# EAGLE board eBook_Reader_Board (EAGLE 9.7.0)
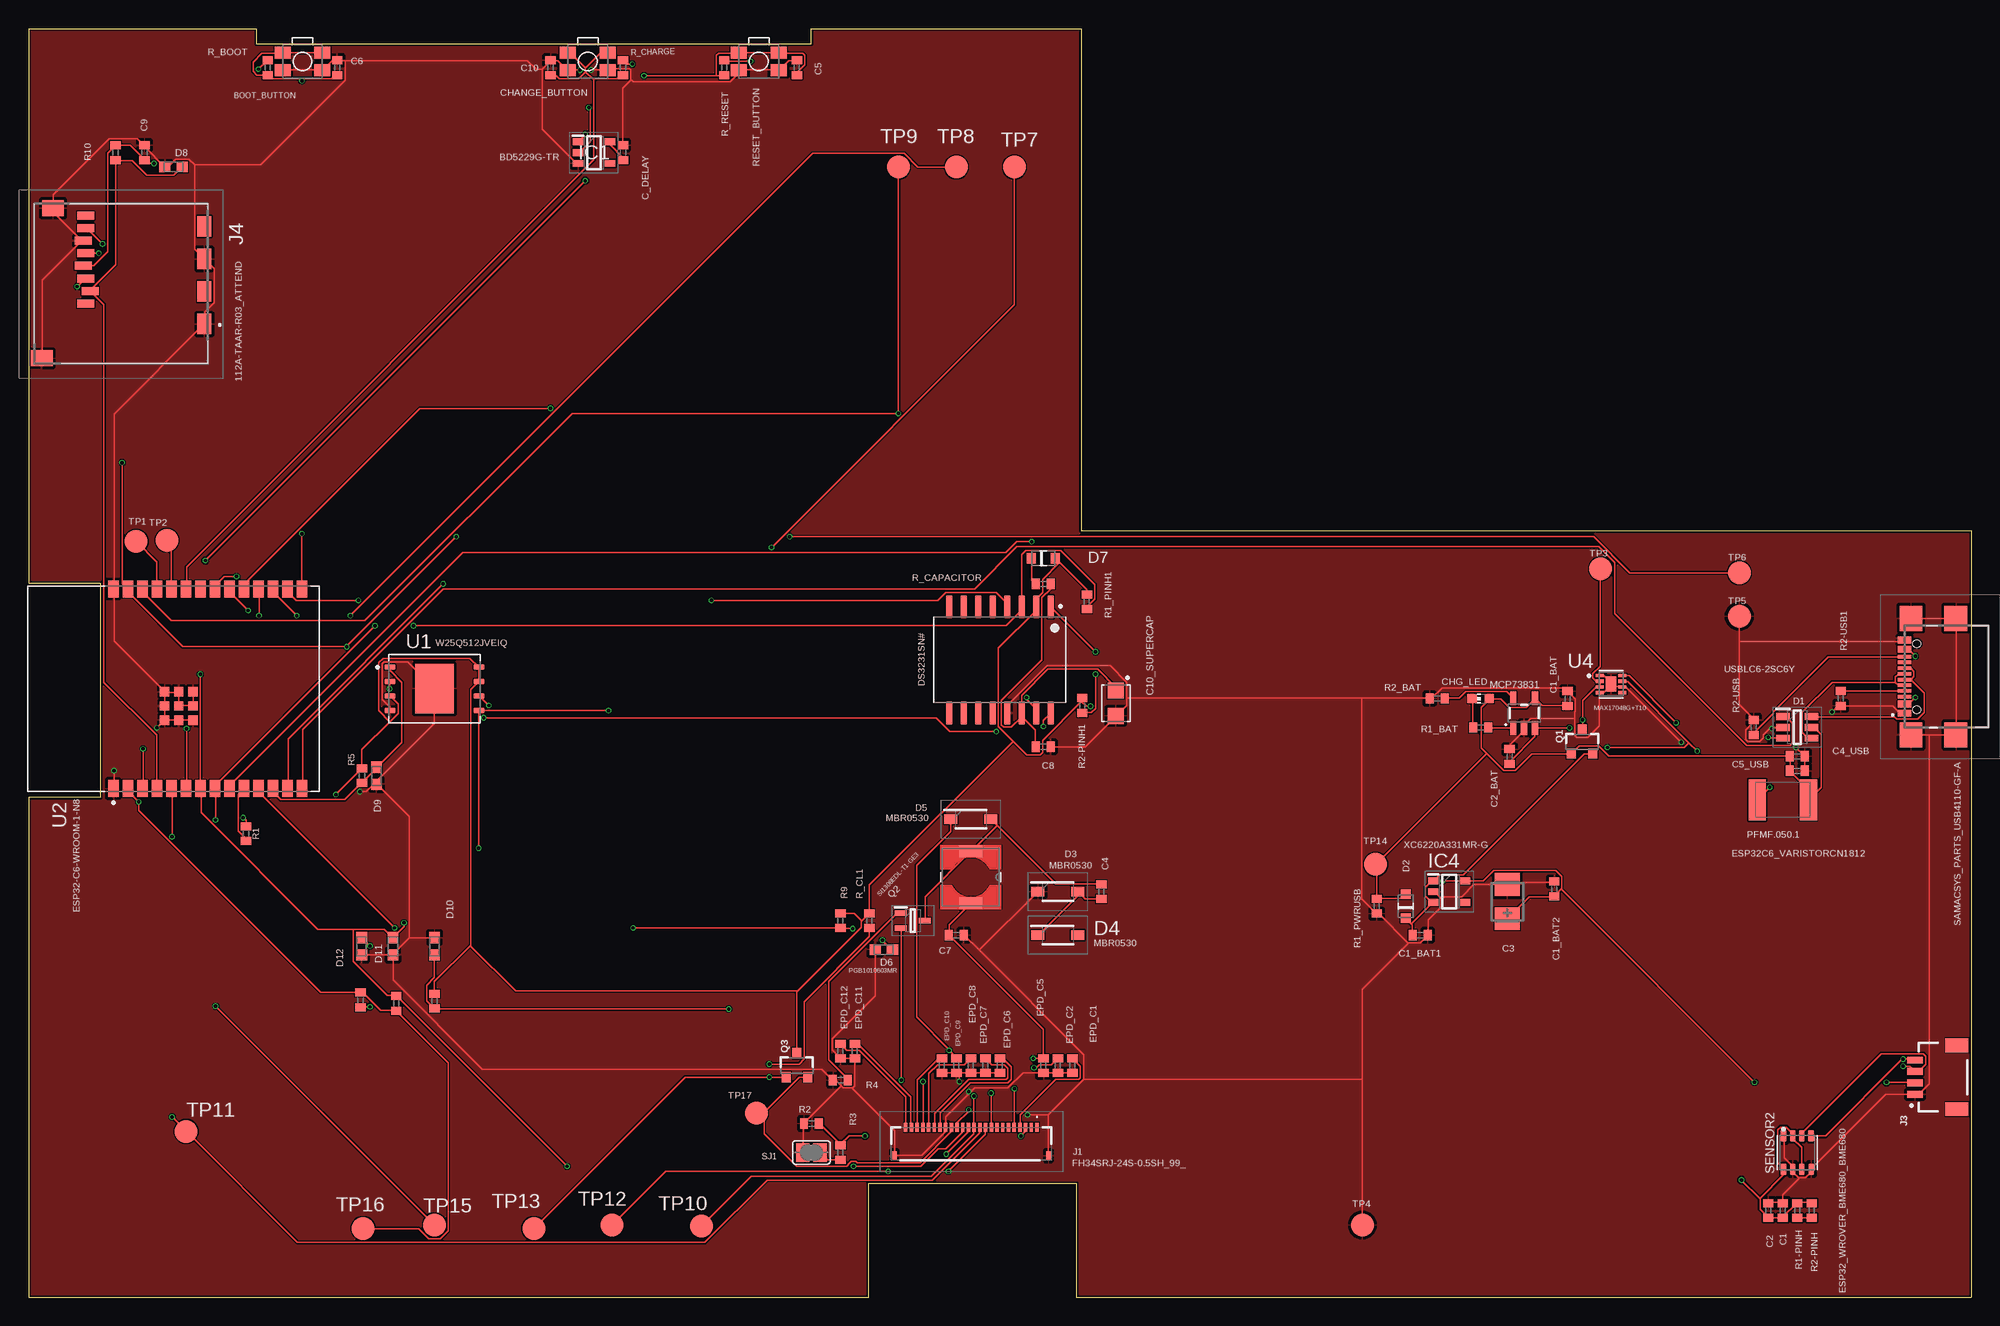
[diagram p0: board, top side]
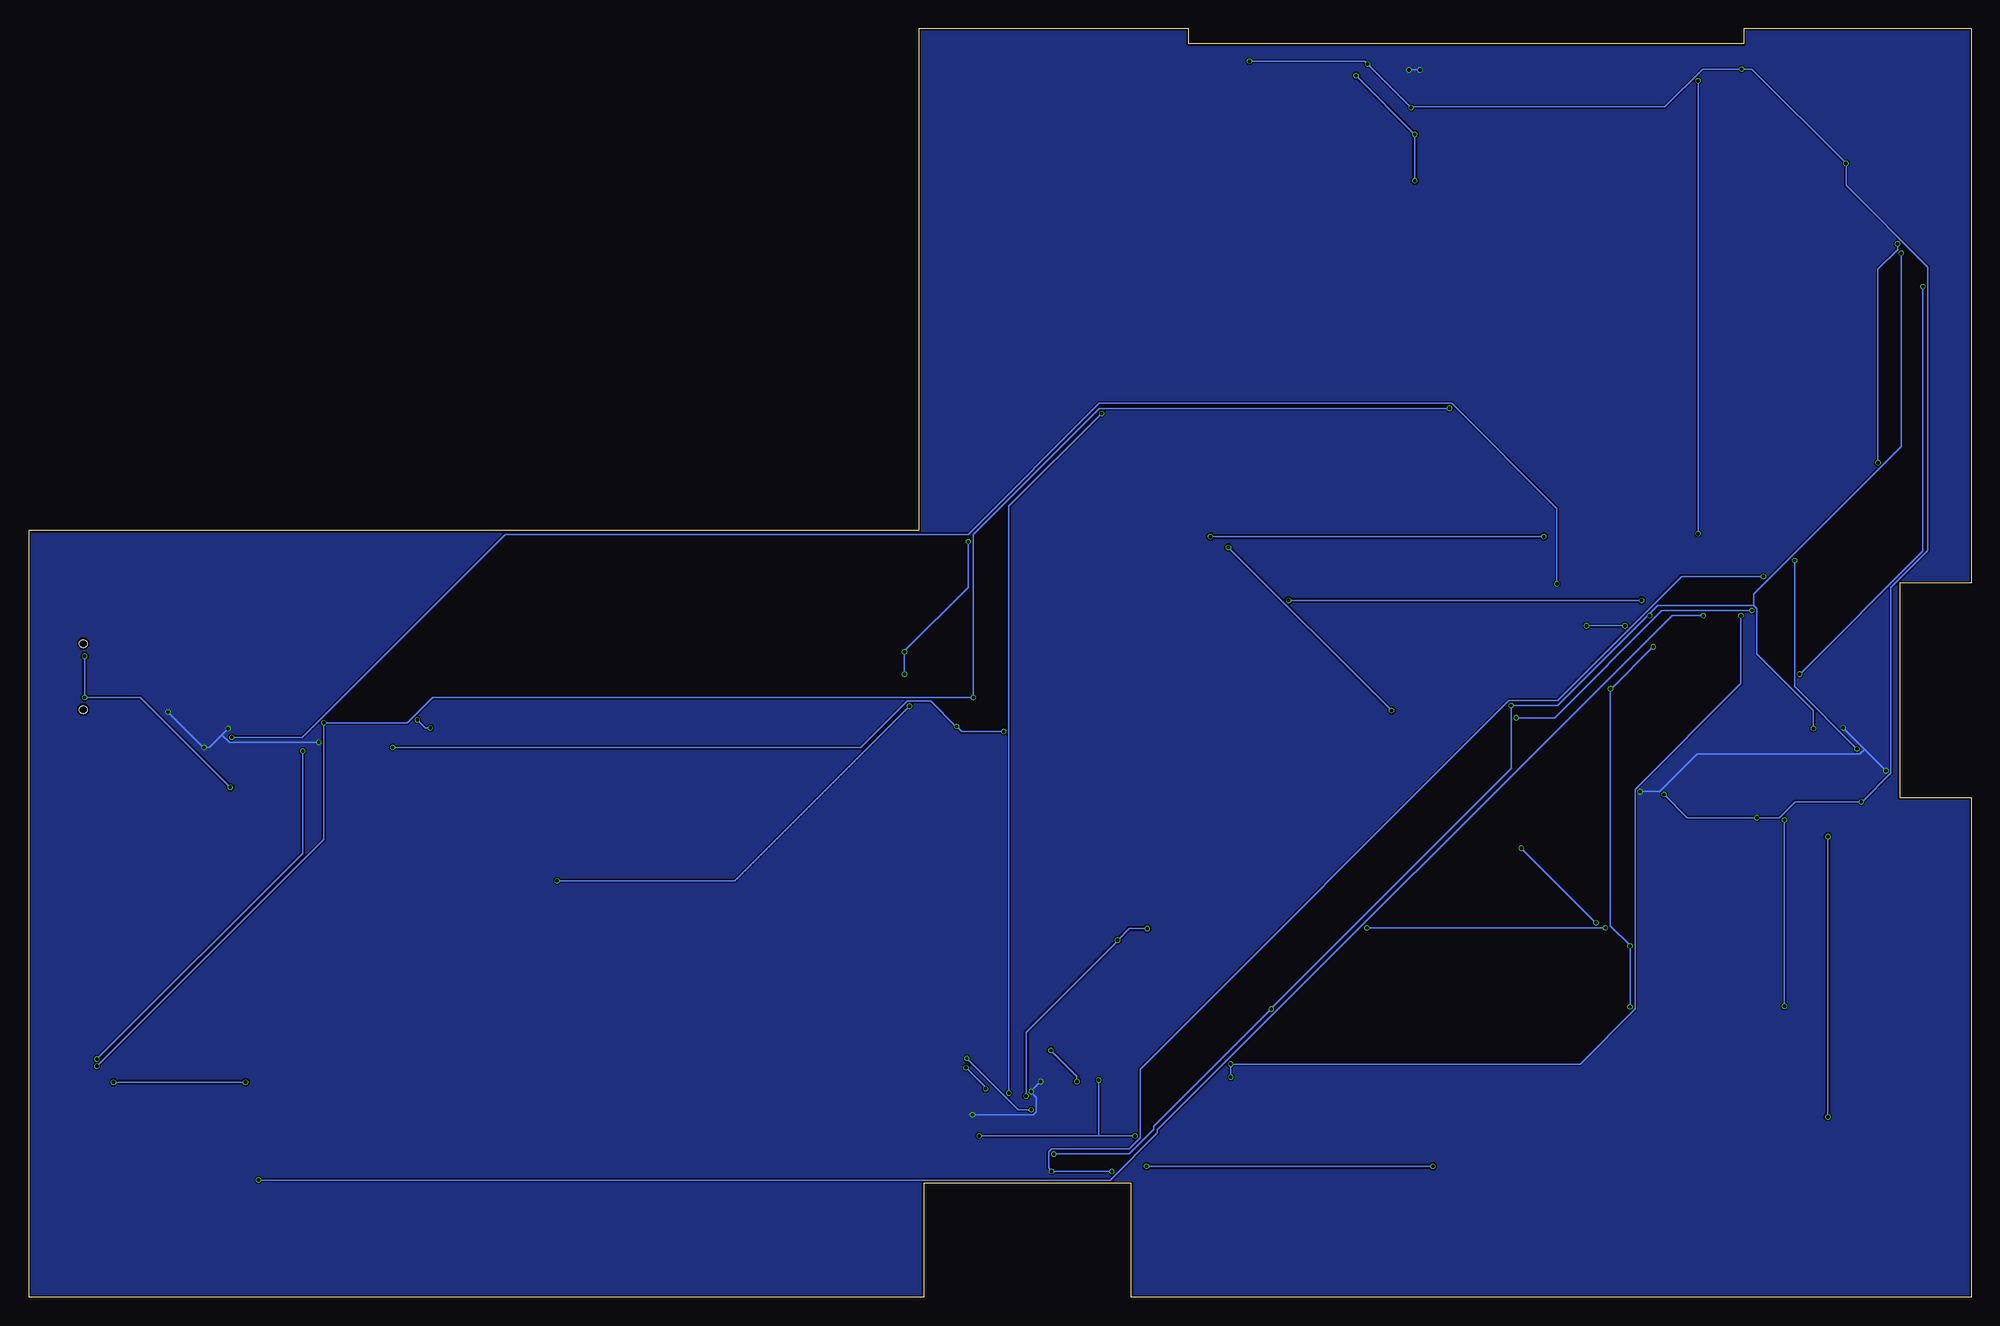
[diagram p1: board, bottom side, seen from below]

Size 170.2 x 111.2 mm. Coordinates in mm from the lower left corner, seen from the top.
Outline: 0,111.2 0,62.6 6.3,62.6 6.3,43.8 0,43.8 0,0 73.6,0 73.6,10 91.8,10 91.8,0 170.2,0 170.2,67.2 92.2,67.2 92.2,111.2 68.58,111.2 68.58,109.86 19.96,109.86 19.96,111.2 0,111.2
Copper layers (1*16): Top / Bottom
Stack-up Default Layer Stack: Top User Defined 0.035mm / Dielectric-1 User Defined 1mm / Bottom User Defined 0.035mm
Design rules: minimum drill size 0.3mm, minimum copper width classes=1 0.3mm, minimum copper width classes=2 0.15mm, minimum copper width 5mil, keepout clearance 0mil, drill distance 6mil, via restrict clearance 0mil, dimension clearance 0.2mm, restrict clearance 0mil, copper clearance wire_polygon to wire_polygon 5mil, copper clearance wire_polygon to pad_smd 5mil, copper clearance wire_polygon to via 5mil, copper clearance pad_smd to pad_smd 5mil, copper clearance pad_smd to via 5mil, copper clearance via to via 5mil, copper clearance smd to pad (same net) 5mil, copper clearance smd to via (same net) 5mil, copper clearance smd to smd (same net) 5mil
Net classes: 1 power nets: width 0.3 mm; 2 normal nets: width 0.15 mm

## Footprints (pad centres in the part's own frame; a part is rotated, then mirrored left to right if it is on the bottom)
MYBUTTON = smd 1.4 x 1.05: 1 1.75,0.75; 2 -1.75,0.75; 3 -1.75,-0.75; 4 1.75,-0.75
EAGLE-LTSPICE_C0402 = smd 0.7 x 0.9: 1 -0.65,0; 2 0.65,0
RCL_CT3528 = smd 2 x 2.2: + -1.5,0; - 1.5,0
CAPCP3225X100N = smd 1.4 x 1.4: 1 -1.1,0; 2 1.1,0
ADAFRUIT_CHIP-LED0603 = smd 0.8 x 0.8: A 0,-0.75; C 0,0.75
SOT95P280X145-6N = smd 1.2 x 0.6: 1 -1.25,0.95; 2 -1.25,0; 3 -1.25,-0.95; 4 1.25,-0.95; 5 1.25,0; 6 1.25,0.95
ESP32_WROVER_AVX---SD0805S020S1R0_AVX_SD0805S020S1R0_0 = smd 0.8 x 0.9: 1 -1.05,0; 2 1.05,0
SOD3716X135N = smd 1.15 x 0.8: 1 -1.75,0; 2 1.75,0
DIOC1608X36N = smd 0.97 x 0.94: 1 -0.75,0; 2 0.75,0
ESP32_WROVER_EAGLE-LTSPICE_C0402 = smd 0.7 x 0.9: 1 -0.65,0; 2 0.65,0
SOT95P280X125-5N = smd 0.9 x 0.6: 1 -1.4,0.95; 2 -1.4,0; 3 -1.4,-0.95; 4 1.4,-0.95; 5 1.4,0.95
SOT95P280X120-5N = smd 0.9 x 0.6: 1 -1.4,0.95; 2 -1.4,0; 3 -1.4,-0.95; 4 1.4,-0.95; 5 1.4,0.95
FH34SRJ24S05SH99 = smd 0.3 x 0.8: 1 5.75,1.45; 2 5.25,1.45; 3 4.75,1.45; 4 4.25,1.45; 5 3.75,1.45; 6 3.25,1.45; 7 2.75,1.45; 8 2.25,1.45; 9 1.75,1.45; 10 1.25,1.45; 11 0.75,1.45; 12 0.25,1.45; 13 -0.25,1.45; 14 -0.75,1.45; 15 -1.25,1.45; 16 -1.75,1.45; 17 -2.25,1.45; 18 -2.75,1.45; 19 -3.25,1.45; 20 -3.75,1.45; 21 -4.25,1.45; 22 -4.75,1.45; 23 -5.25,1.45; 24 -5.75,1.45 | smd 0.4 x 0.8: MP1 6.75,-1.05; MP2 -6.75,-1.05
SAMACSYS_PARTS_USB4110GFA = smd 0.3 x 1.15: A1 -3.35,3.678; A4 -2.55,3.678; A5 -1.25,3.678; A6 -0.25,3.678; A7 0.25,3.678; A8 1.25,3.678; A9 2.55,3.678; A12 3.35,3.678; B1 3.05,3.678; B4 2.25,3.678; B5 1.75,3.678; B6 0.75,3.678; B7 -0.75,3.678; B8 -1.75,3.678; B9 -2.25,3.678; B12 -3.05,3.678 | smd 2.18 x 2: MP1 -5.11,-0.827; MP2 5.11,-0.827; MP3 -5.11,3.103; MP4 5.11,3.103 | hole 0.65: -2.89,2.603; 2.89,2.603
JST04_1MM_RA = smd 0.6 x 1.35: 1 -1.5,0; 2 -0.5,0; 3 0.5,0; 4 1.5,0 | smd 1.2 x 2: NC1 2.8,-3.675; NC2 -2.8,-3.675
112ATAARR03ATTEND = smd 1.8 x 1.2: G1 10.6,10.4; G2 4.9,10.4; S1 7.75,10.4; S2 2.05,10.4 | smd 1.4 x 1.9: G3 13.6,-3.85; G4 0.45,-2.85 | smd 0.7 x 1.5: P1 8.8,0; P2 7.7,0.4; P3 6.6,0; P4 5.5,-0.2; P5 4.4,0; P6 3.3,-0.2; P7 2.2,0; P8 1.1,0
IND_4828-WE-TPC_WRE = smd 1.016 x 2.032: 1 -2.286,0; 2 2.286,0
ESP32_WROVER_SPARKFUN-IC-POWER_SOT23-5 = smd 0.55 x 1.2: 1 -0.95,-1.3; 2 0,-1.3; 3 0.95,-1.3; 4 0.95,1.3; 5 -0.95,1.3
ESP32C6_VARISTOR_CT/CN1812 = smd 1.5 x 3.6: 1 -2.25,0; 2 2.25,0
ESP32_WROVER_SPARKFUN-DISCRETESEMI_SOT23-3 = smd 0.8 x 0.9: 1 -0.95,-1; 2 0.95,-1; 3 0,1.1
SOT65P210X110-3N = smd 1.05 x 0.5: 1 -1.05,0.65; 2 -1.05,-0.65; 3 1.05,0
ESP32_WROVER_EAGLE-LTSPICE_R0402 = smd 0.7 x 0.9: 1 -0.65,0; 2 0.65,0
ESP32_WROVER_BME680_PSON80P300X300X100-8N = smd 1.016 x 0.5: 1 1.458,1.2; 2 1.458,0.4; 3 1.458,-0.4; 4 1.458,-1.2; 5 -1.458,-1.22; 6 -1.458,-0.4; 7 -1.458,0.4; 8 -1.458,1.2
SJ = smd 1.168 x 1.6: 1 -0.762,0; 2 0.762,0
TP20R = smd 2 x 2: TP 0,0
SON127P600X800X80-9N = smd 0.94 x 0.44: 1 -3.895,1.905; 2 -3.895,0.635; 3 -3.895,-0.635; 4 -3.895,-1.905; 5 3.895,-1.905; 6 3.895,-0.635; 7 3.895,0.635; 8 3.895,1.905 | smd 3.4 x 4.3: 9 0,0
XCVR_ESP32-C6-WROOM-1-N8 = smd 1.5 x 0.9: 1 -8.75,5.26; 2 -8.75,3.99; 3 -8.75,2.72; 4 -8.75,1.45; 5 -8.75,0.18; 6 -8.75,-1.09; 7 -8.75,-2.36; 8 -8.75,-3.63; 9 -8.75,-4.9; 10 -8.75,-6.17; 11 -8.75,-7.44; 12 -8.75,-8.71; 13 -8.75,-9.98; 14 -8.75,-11.25; 15 8.75,-11.25; 16 8.75,-9.98; 17 8.75,-8.71; 18 8.75,-7.44; 19 8.75,-6.17; 20 8.75,-4.9; 21 8.75,-3.63; 22 8.75,-2.36; 23 8.75,-1.09; 24 8.75,0.18; 25 8.75,1.45; 26 8.75,2.72; 27 8.75,3.99; 28 8.75,5.26 | smd 0.8 x 0.8: 29_1 -2.755,0.79; 29_2 -1.505,0.79; 29_3 -0.255,0.79; 29_4 -2.755,-0.46; 29_5 -1.505,-0.46; 29_6 -0.255,-0.46; 29_7 -2.755,-1.71; 29_8 -1.505,-1.71; 29_9 -0.255,-1.71
SOIC127P1032X265-16N = smd 2.05 x 0.59: 1 -4.655,4.445; 2 -4.655,3.175; 3 -4.655,1.905; 4 -4.655,0.635; 5 -4.655,-0.635; 6 -4.655,-1.905; 7 -4.655,-3.175; 8 -4.655,-4.445; 9 4.655,-4.445; 10 4.655,-3.175; 11 4.655,-1.905; 12 4.655,-0.635; 13 4.655,0.635; 14 4.655,1.905; 15 4.655,3.175; 16 4.655,4.445
SON50P200X200X80-9N = smd 0.76 x 0.27: 1 -0.985,0.75; 2 -0.985,0.25; 3 -0.985,-0.25; 4 -0.985,-0.75; 5 0.985,-0.75; 6 0.985,-0.25; 7 0.985,0.25; 8 0.985,0.75 | smd 0.9 x 1.3: 9 0,0

## Placement (x,y rotation side)
BOOT_BUTTON  BUTTON_CUSYOMV1  [MYBUTTON]  24,108.31 180 top
C1  100nF  [EAGLE-LTSPICE_C0402]  153.67,7.62 90 top
C1_BAT  4.7uF  [EAGLE-LTSPICE_C0402]  134.82,52.48 90 top
C1_BAT1  4.7uF  [EAGLE-LTSPICE_C0402]  121.92,31.75 0 top
C1_BAT2  4.7uF  [EAGLE-LTSPICE_C0402]  133.65,35.79 90 top
C2  100nF  [EAGLE-LTSPICE_C0402]  152.4,7.62 90 top
C2_BAT  4.7uF  [EAGLE-LTSPICE_C0402]  129.74,47.4 90 top
C3  100uF TANT  [RCL_CT3528]  129.54,34.69 90 top
C4  4.7uF/25V  [EAGLE-LTSPICE_C0402]  93.98,35.56 90 top
C4_USB  100nF  [EAGLE-LTSPICE_C0402]  154.94,47.42 0 top
C5  1uF  [EAGLE-LTSPICE_C0402]  67.31,107.77 90 top
C5_USB  4.7uF  [EAGLE-LTSPICE_C0402]  154.94,46.15 0 top
C6  100nF  [EAGLE-LTSPICE_C0402]  27.05,107.77 90 top
C7  100nF  [EAGLE-LTSPICE_C0402]  81.28,31.75 0 top
C8  100nF  [EAGLE-LTSPICE_C0402]  88.9,48.26 0 top
C9  100nF  [EAGLE-LTSPICE_C0402]  10.16,100.33 90 top
C10  100nF  [EAGLE-LTSPICE_C0402]  45.72,107.77 90 top
C10_SUPERCAP  CPH3225A  [CAPCP3225X100N]  95.25,52.07 270 top
C_DELAY  100nF  [EAGLE-LTSPICE_C0402]  52.07,100.33 90 top
CHANGE_BUTTON  BUTTON_CUSYOMV1  [MYBUTTON]  49,108.31 180 top
CHG_LED  [ADAFRUIT_CHIP-LED0603]  127.2,52.48 90 top
D1  USBLC6-2SC6Y  [SOT95P280X145-6N]  154.94,49.96 0 top
D2  ESP32_WROVER_AVX---SD0805S020S1R0_AVX_SD0805S020S1R0_0_0AVX_SD0805S020S1R0_0_0  [ESP32_WROVER_AVX---SD0805S020S1R0_AVX_SD0805S020S1R0_0]  120.65,34.29 90 top
D3  MBR0530  [SOD3716X135N]  90.17,35.56 0 top
D4  MBR0530  [SOD3716X135N]  90.17,31.75 0 top
D5  MBR0530  [SOD3716X135N]  82.55,41.91 0 top
D6  PGB1010603MR  [DIOC1608X36N]  74.93,30.48 0 top
D7  ESP32_WROVER_AVX---SD0805S020S1R0_AVX_SD0805S020S1R0_0_0AVX_SD0805S020S1R0_0_0  [ESP32_WROVER_AVX---SD0805S020S1R0_AVX_SD0805S020S1R0_0]  88.9,64.77 0 top
D8  PGB1010603MR  [DIOC1608X36N]  12.7,99.06 0 top
D9  PGB1010603MR  [DIOC1608X36N]  30.48,45.72 90 top
D10  PGB1010603MR  [DIOC1608X36N]  35.56,30.78 270 top
D11  PGB1010603MR  [DIOC1608X36N]  31.92,30.78 90 top
D12  PGB1010603MR  [DIOC1608X36N]  29.18,30.78 90 top
EPD_C1  1uF/50V  [ESP32_WROVER_EAGLE-LTSPICE_C0402]  91.44,20.32 90 top
EPD_C2  1uF/50V  [ESP32_WROVER_EAGLE-LTSPICE_C0402]  90.17,20.32 90 top
EPD_C5  1uF/50V  [ESP32_WROVER_EAGLE-LTSPICE_C0402]  88.9,20.32 90 top
EPD_C6  1uF/50V  [ESP32_WROVER_EAGLE-LTSPICE_C0402]  85.09,20.32 90 top
EPD_C7  1uF/50V  [ESP32_WROVER_EAGLE-LTSPICE_C0402]  83.82,20.32 90 top
EPD_C8  1uF/50V  [ESP32_WROVER_EAGLE-LTSPICE_C0402]  82.55,20.32 90 top
EPD_C9  1uF/50V  [ESP32_WROVER_EAGLE-LTSPICE_C0402]  81.28,20.32 90 top
EPD_C10  1uF/50V  [ESP32_WROVER_EAGLE-LTSPICE_C0402]  80.01,20.32 90 top
EPD_C11  1uF/50V  [ESP32_WROVER_EAGLE-LTSPICE_C0402]  72.39,21.59 90 top
EPD_C12  1uF/50V  [ESP32_WROVER_EAGLE-LTSPICE_C0402]  71.12,21.59 90 top
IC1  BD5229G-TR  [SOT95P280X125-5N]  49.53,100.33 0 top
IC4  XC6220A331MR-G  [SOT95P280X120-5N]  124.46,35.56 0 top
J1  FH34SRJ-24S-0.5SH_99_  [FH34SRJ24S05SH99]  82.59,13.47 0 top
J2  SAMACSYS_PARTS_USB4110-GF-A  [SAMACSYS_PARTS_USB4110GFA]  168.01,54.4 90 top
J3  QWIIC_RIGHT_ANGLE  [JST04_1MM_RA]  165.25,19.3 90 top
J4  112A-TAAR-R03_ATTEND  [112ATAARR03ATTEND]  5,95.9 270 top
L1  68uH  [IND_4828-WE-TPC_WRE]  82.55,36.83 270 top
MCP73831  ESP32_WROVER_SPARKFUN-IC-POWER_MCP73831  [ESP32_WROVER_SPARKFUN-IC-POWER_SOT23-5]  131.01,51.21 0 top
PFMF.050.1  ESP32C6_VARISTORCN1812  [ESP32C6_VARISTOR_CT/CN1812]  153.67,43.61 0 top
Q1  20V/4.2A/52mΩ/1.4W  [ESP32_WROVER_SPARKFUN-DISCRETESEMI_SOT23-3]  136.09,48.67 0 top
Q2  SI1308EDL-T1-GE3  [SOT65P210X110-3N]  77.47,33.02 0 top
Q3  20V/4.2A/52mΩ/1.4W  [ESP32_WROVER_SPARKFUN-DISCRETESEMI_SOT23-3]  67.31,20.32 0 top
R1  10k  [ESP32_WROVER_EAGLE-LTSPICE_R0402]  19.05,40.64 90 top
R1-PINH  10k  [ESP32_WROVER_EAGLE-LTSPICE_R0402]  154.94,7.62 90 top
R1_BAT  200  [ESP32_WROVER_EAGLE-LTSPICE_R0402]  127.2,49.94 0 top
R1_PINH1  10K  [ESP32_WROVER_EAGLE-LTSPICE_R0402]  92.71,60.96 90 top
R1_PWRUSB  100k  [ESP32_WROVER_EAGLE-LTSPICE_R0402]  118.11,34.29 90 top
R2  2.2  [ESP32_WROVER_EAGLE-LTSPICE_R0402]  68.58,15.24 0 top
R2-PINH  10k  [ESP32_WROVER_EAGLE-LTSPICE_R0402]  156.21,7.62 90 top
R2-PINH1  10K  [ESP32_WROVER_EAGLE-LTSPICE_R0402]  92.31,51.87 90 top
R2-USB  5k1  [ESP32_WROVER_EAGLE-LTSPICE_R0402]  151.13,49.96 90 top
R2-USB1  5k1  [ESP32_WROVER_EAGLE-LTSPICE_R0402]  158.75,52.5 90 top
R2_BAT  2K  [ESP32_WROVER_EAGLE-LTSPICE_R0402]  123.39,52.48 0 top
R3  0.47  [ESP32_WROVER_EAGLE-LTSPICE_R0402]  71.12,12.7 90 top
R4  10k  [ESP32_WROVER_EAGLE-LTSPICE_R0402]  71.12,19.05 0 top
R5  10k  [ESP32_WROVER_EAGLE-LTSPICE_R0402]  29.21,45.72 90 top
R6  10k  [ESP32_WROVER_EAGLE-LTSPICE_R0402]  35.56,25.97 90 top
R7  10k  [ESP32_WROVER_EAGLE-LTSPICE_R0402]  32.22,25.77 270 top
R8  10k  [ESP32_WROVER_EAGLE-LTSPICE_R0402]  29.08,26.07 90 top
R9  10k  [ESP32_WROVER_EAGLE-LTSPICE_R0402]  71.12,33.02 90 top
R10  10k  [ESP32_WROVER_EAGLE-LTSPICE_R0402]  7.62,100.33 90 top
R_BOOT  10K  [ESP32_WROVER_EAGLE-LTSPICE_R0402]  20.95,107.77 90 top
R_CAPACITOR  15  [ESP32_WROVER_EAGLE-LTSPICE_R0402]  88.9,62.53 0 top
R_CHARGE  10K  [ESP32_WROVER_EAGLE-LTSPICE_R0402]  52.07,107.77 90 top
R_CL1  10K  [ESP32_WROVER_EAGLE-LTSPICE_R0402]  73.66,33.02 90 top
R_RESET  10K  [ESP32_WROVER_EAGLE-LTSPICE_R0402]  60.95,107.77 90 top
RESET_BUTTON  BUTTON_CUSYOMV1  [MYBUTTON]  63.97,108.31 180 top
SENSOR2  ESP32_WROVER_BME680_BME680  [ESP32_WROVER_BME680_PSON80P300X300X100-8N]  154.94,12.7 90 top
SJ1  [SJ]  68.58,12.7 0 top
TP1  TPTP20R  [TP20R]  9.43,66.25 0 top
TP2  TPTP20R  [TP20R]  12.13,66.35 0 top
TP3  TPTP20R  [TP20R]  137.72,63.85 0 top
TP4  TPTP20R  [TP20R]  116.84,6.35 0 top
TP5  TPTP20R  [TP20R]  149.86,59.69 0 top
TP6  TPTP20R  [TP20R]  149.86,63.5 0 top
TP7  TPTP20R  [TP20R]  86.36,99.06 0 top
TP8  TPTP20R  [TP20R]  81.28,99.06 0 top
TP9  TPTP20R  [TP20R]  76.2,99.06 0 top
TP10  TPTP20R  [TP20R]  58.96,6.25 0 top
TP11  TPTP20R  [TP20R]  13.81,14.55 0 top
TP12  TPTP20R  [TP20R]  51.11,6.35 0 top
TP13  TPTP20R  [TP20R]  44.26,6.05 0 top
TP14  TPTP20R  [TP20R]  118.01,37.95 0 top
TP15  TPTP20R  [TP20R]  35.56,6.35 0 top
TP16  TPTP20R  [TP20R]  29.31,6.05 0 top
TP17  TPTP20R  [TP20R]  63.76,16.15 0 top
U1  W25Q512JVEIQ  [SON127P600X800X80-9N]  35.56,53.34 0 top
U2  ESP32-C6-WROOM-1-N8  [XCVR_ESP32-C6-WROOM-1-N8]  12.7,53.34 90 top
U3  DS3231SN#  [SOIC127P1032X265-16N]  85.09,55.88 270 top
U4  MAX17048G+T10  [SON50P200X200X80-9N]  138.63,53.75 0 top

## Library data of the parts
BOOT_BUTTON CHANGE_BUTTON CHG_LED PFMF.050.1 RESET_BUTTON SJ1 TP1-TP17 = DeskAssistant v19 v1
C1 C1_BAT C1_BAT1 C1_BAT2 C2 C2_BAT C4 C4_USB C5 C5_USB C6-C10 C_DELAY EPD_C1 EPD_C2 EPD_C5-EPD_C12 = DeskAssistant v19 v1; SPICEMODEL: NONE; SPICEPREFIX: C
C3 = DeskAssistant v19 v1; SPICEPREFIX: C
C10_SUPERCAP = DeskAssistant v19 v1; AVAILABILITY: Not in stock; CHECK_PRICES: https://www.snapeda.com/parts/CPH3225A/Seiko+Instruments/view-part/?ref=eda; DESCRIPTION: 11 mF (EDLC) Supercapacitor 3.3 V 1210 (3225 Metric) - -; MF: Seiko Instruments; MP: CPH3225A; PACKAGE: 1210 Seiko; PRICE: None; PURCHASE-URL: https://www.snapeda.com/api/url_track_click_mouser/?unipart_id=562593&manufacturer=Seiko Instruments&part_name=CPH3225A&search_term=None; SNAPEDA_LINK: https://www.snapeda.com/parts/CPH3225A/Seiko+Instruments/view-part/?ref=snap
D1 = DeskAssistant v19 v1; AVAILABILITY: In Stock; CHECK_PRICES: https://www.snapeda.com/parts/USBLC6-2SC6Y/STMicroelectronics/view-part/?ref=eda; DESCRIPTION: 17V Clamp 5A (8/20µs) Ipp Tvs Diode Surface Mount SOT-23-6; MF: STMicroelectronics; MP: USBLC6-2SC6Y; PACKAGE: SOT-23-6 STMicroelectronics; PRICE: None; SNAPEDA_LINK: https://www.snapeda.com/parts/USBLC6-2SC6Y/STMicroelectronics/view-part/?ref=snap
D2 D7 = DeskAssistant v19 v1; CENTROID_NOT_SPECIFIED: No; DATASHEET: http://datasheets.avx.com/schottky.pdf; DIGIKEY_DESCRIPTION: DIODE SCHOTTKY 20V 1A 0805; DIGIKEY_PART_NUMBER: 478-7800-1-ND; LEAD_FREE: yes; MF: AVX; MOUSER_PART_NUMBER: 581-SD0805S020S1R0; PACKAGE: 0805 (2012 metric); PREFIX: D; ROHS: yes; TEMPERATURE_RANGE_HIGH: +125°C; TEMPERATURE_RANGE_LOW: -55°C
D3-D5 = DeskAssistant v19 v1; AVAILABILITY: In Stock; CHECK_PRICES: https://www.snapeda.com/parts/MBR0530/Onsemi/view-part/?ref=eda; DESCRIPTION: Diode Schottky 30 V 500mA Surface Mount SOD-123; MF: ON Semiconductor; MP: MBR0530; PACKAGE: SOD-123-2 ON Semiconductor; PRICE: None; PURCHASE-URL: https://www.snapeda.com/api/url_track_click_mouser/?unipart_id=179458&manufacturer=ON Semiconductor&part_name=MBR0530&search_term=None; SNAPEDA_LINK: https://www.snapeda.com/parts/MBR0530/Onsemi/view-part/?ref=snap
D6 D8-D12 = DeskAssistant v19 v1; AVAILABILITY: In Stock; CHECK_PRICES: https://www.snapeda.com/parts/PGB1010603MR/Littelfuse/view-part/?ref=eda; DESCRIPTION: 150V (Typ) Clamp - Ipp Tvs Diode Surface Mount 0603 (1608 Metric); MF: Littelfuse Inc.; MP: PGB1010603MR; PACKAGE: 0603 Littelfuse Inc.; PRICE: None; PURCHASE-URL: https://www.snapeda.com/api/url_track_click_mouser/?unipart_id=5659453&manufacturer=Littelfuse Inc.&part_name=PGB1010603MR&search_term=None; SNAPEDA_LINK: https://www.snapeda.com/parts/PGB1010603MR/Littelfuse/view-part/?ref=snap
IC1 = DeskAssistant v19 v1; DESCRIPTION: Voltage Detector with Adjustable Delay Time: CMOS processes are utilized to develop high precision, low current consumption CMOS reset ICs that allow arbitrary setting of the delay time. The extensive lineup includes both Nch Open Drain and CMOS output types in a wide range of detection voltages (from 2.3V to 6.0V, in 0.1V steps), enabling selection of the ideal solution based on customer requirements. In addition, the entire series is of course both lead-free and RoHS-compliant.; HEIGHT: 1.25mm; MANUFACTURER_NAME: ROHM Semiconductor; MANUFACTURER_PART_NUMBER: BD5229G-TR; MOUSER_PART_NUMBER: 755-BD5229G-TR; MOUSER_PRICE-STOCK: https://www.mouser.co.uk/ProductDetail/ROHM-Semiconductor/BD5229G-TR?qs=4kLU8WoGk0vvnhrrYwdszw%3D%3D
IC4 = DeskAssistant v19 v1; DESCRIPTION: LDO Voltage Regulators; HEIGHT: 1.2mm; MANUFACTURER_NAME: Torex; MANUFACTURER_PART_NUMBER: XC6220A331MR-G; MOUSER_PART_NUMBER: 865-XC6220A331MR-G; MOUSER_PRICE-STOCK: https://www.mouser.co.uk/ProductDetail/Torex-Semiconductor/XC6220A331MR-G?qs=AsjdqWjXhJ8ZSWznL1J0gg%3D%3D
J1 = DeskAssistant v19 v1; DESCRIPTION: 24 Position FFC, FPC Connector Contacts, Top and Bottom 0.020" (0.50mm) Surface Mount, Right Angle; HEIGHT: 1.1mm; MANUFACTURER_NAME: Hirose; MANUFACTURER_PART_NUMBER: FH34SRJ-24S-0.5SH(99); MOUSER_PART_NUMBER: 798-FH34SRJ24S05SH99; MOUSER_PRICE-STOCK: https://www.mouser.co.uk/ProductDetail/Hirose-Connector/FH34SRJ-24S-0.5SH99?qs=vcbW%252B4%252BSTIpKBl5ap9J8Fw%3D%3D
J2 = DeskAssistant v19 v1; DESCRIPTION: CONN USB 2.0 TYPE-C R/A SMT; HEIGHT: 3.26mm; MANUFACTURER_NAME: GCT (GLOBAL CONNECTOR TECHNOLOGY); MANUFACTURER_PART_NUMBER: USB4110-GF-A; MOUSER_PART_NUMBER: 640-USB4110-GF-A; MOUSER_PRICE-STOCK: https://www.mouser.co.uk/ProductDetail/GCT/USB4110-GF-A?qs=KUoIvG%2F9IlYiZvIXQjyJeA%3D%3D
J3 = DeskAssistant v19 v1; PROD_ID: CONN-13694
J4 = DeskAssistant v19 v1; DESCRIPTION: Micro SD Card Socket, Push-Push Type, Top Mount, SMT, H=1.83mm, 10u; HEIGHT: 1.9mm; MANUFACTURER_NAME: ATTEND; MANUFACTURER_PART_NUMBER: 112A-TAAR-R03 ATTEND
L1 = DeskAssistant v19 v1; COPYRIGHT: Copyright (C) 2024 Ultra Librarian. All rights reserved.; MANUFACTURER_PART_NUMBER: 744043680; MFR_NAME: Wurth Electronics
MCP73831 = DeskAssistant v19 v1; PROD_ID: IC-09995
Q1 Q3 = DeskAssistant v19 v1; PROD_ID: TRAN-14388
Q2 = DeskAssistant v19 v1; AVAILABILITY: In Stock; CHECK_PRICES: https://www.snapeda.com/parts/SI1308EDL-T1-GE3/Vishay+Siliconix/view-part/?ref=eda; DESCRIPTION: Si1308EDL-T1-GE3 N-channel MOSFET Transistor, 1.5 A, 30 V, 3-Pin SC-70 | Siliconix / Vishay SI1308EDL-T1-GE3; MF: Vishay Siliconix; MP: SI1308EDL-T1-GE3; PACKAGE: SOT-323 Vishay Semiconductor; PRICE: None; PURCHASE-URL: https://www.snapeda.com/api/url_track_click_mouser/?unipart_id=274603&manufacturer=Vishay Siliconix&part_name=SI1308EDL-T1-GE3&search_term=None; SNAPEDA_LINK: https://www.snapeda.com/parts/SI1308EDL-T1-GE3/Vishay+Siliconix/view-part/?ref=snap
R1 R1-PINH R1_BAT R1_PINH1 R1_PWRUSB R2 R2-PINH R2-PINH1 R2-USB R2-USB1 R2_BAT R3-R10 R_BOOT R_CAPACITOR R_CHARGE R_CL1 R_RESET = DeskAssistant v19 v1; SPICEMODEL: NONE; SPICEPREFIX: R
SENSOR2 = DeskAssistant v19 v1; AVAILABILITY: Unavailable; DESCRIPTION: Integrated Environmental Unit; MF: Bosch Sensortec; MP: BME680; PACKAGE: LGA-8 Bosch Tools; PRICE: None
U1 = DeskAssistant v19 v1; AVAILABILITY: In Stock; CHECK_PRICES: https://www.snapeda.com/parts/W25Q512JVEIQ/Winbond+Electronics/view-part/?ref=eda; DESCRIPTION: FLASH - NOR Memory IC 512Mb (64M x 8) SPI - Quad I/O 133 MHz 8-WSON (8x6); MF: Winbond Electronics; MP: W25Q512JVEIQ; PACKAGE: Package; PRICE: None; SNAPEDA_LINK: https://www.snapeda.com/parts/W25Q512JVEIQ/Winbond+Electronics/view-part/?ref=snap
U2 = DeskAssistant v19 v1; AVAILABILITY: In Stock; CHECK_PRICES: https://www.snapeda.com/parts/ESP32-C6-WROOM-1-N8/Espressif+Systems/view-part/?ref=eda; DESCRIPTION: Multiprotocol Modules ESP32-C6 module, Wi-Fi 6 in 2.4 GHz band, Bluetooth 5, Zigbee 3.0 and Thread. ESP34-WROOM Compatible - ENGINEERING SAMPLE; MF: Espressif Systems; MP: ESP32-C6-WROOM-1-N8; PACKAGE: None; PRICE: None; SNAPEDA_LINK: https://www.snapeda.com/parts/ESP32-C6-WROOM-1-N8/Espressif+Systems/view-part/?ref=snap
U3 = DeskAssistant v19 v1; AVAILABILITY: In Stock; CHECK_PRICES: https://www.snapeda.com/parts/DS3231SN%23/Analog+Devices/view-part/?ref=eda; DESCRIPTION: Extremely Accurate I²C-Integrated RTC/TCXO/Crystal; MF: Analog Devices; MP: DS3231SN#; PACKAGE: SOIC-16 Maxim; PRICE: None; PURCHASE-URL: https://www.snapeda.com/api/url_track_click_mouser/?unipart_id=99048&manufacturer=Analog Devices&part_name=DS3231SN#&search_term=None; SNAPEDA_LINK: https://www.snapeda.com/parts/DS3231SN%23/Analog+Devices/view-part/?ref=snap
U4 = DeskAssistant v19 v1; AVAILABILITY: In Stock; CHECK_PRICES: https://www.snapeda.com/parts/MAX17048G+T10/Analog+Devices/view-part/?ref=eda; DESCRIPTION: 3µA 1-Cell/2-Cell Fuel Gauge with ModelGauge; MF: Analog Devices; MP: MAX17048G+T10; PACKAGE: TDFN-8 Maxim; PRICE: None; PURCHASE-URL: https://www.snapeda.com/api/url_track_click_mouser/?unipart_id=329239&manufacturer=Analog Devices&part_name=MAX17048G+T10&search_term=None; SNAPEDA_LINK: https://www.snapeda.com/parts/MAX17048G+T10/Analog+Devices/view-part/?ref=snap

## Nets
3V3: C1_BAT2.1 C3.+ C9.1 D7.2 IC1.2 IC4.5 J3.2 J4.P4 Q3.3 R1.2 R1_PINH1.2 R2-PINH1.2 R5.2 R6.2 R7.2 R8.2 R9.2 R10.2 R_BOOT.2 R_CHARGE.2 R_CL1.2 R_RESET.2 TP16.TP U1.3 U1.7 U1.8 U2.2 U3.2
32KHZ [normal nets]: R2-PINH1.1 U2.9 U3.1
DN [normal nets]: D1.4 J2.A7 J2.B7
DP [normal nets]: D1.6 J2.A6 J2.B6
EPD_3V3: C7.1 EPD_C5.2 J1.15 J1.16 L1.2 Q3.2 TP17.TP
EPD_3V3_C: Q3.1 R_CL1.1 TP13.TP U2.18
EPD_BUSY [normal nets]: J1.9 TP9.TP U2.26
EPD_CS [normal nets]: D6.2 J1.12 R9.1 TP10.TP U2.11
EPD_DC [normal nets]: J1.11 TP11.TP U2.5
EPD_RST [normal nets]: J1.10 TP12.TP U2.21
FLASH_CS [normal nets]: D9.2 R5.1 U1.1 U2.12
GDR [normal nets]: J1.2
GND [normal nets]: BOOT_BUTTON.1 BOOT_BUTTON.2 C1.2 C1_BAT1.2 C1_BAT2.2 C1_BAT.2 C2.2 C2_BAT.2 C3.- C4_USB.2 C5.2 C5_USB.2 C6.2 C7.2 C8.2 C9.2 C10.2 C10_SUPERCAP.2 C_DELAY.2 CHANGE_BUTTON.1 CHANGE_BUTTON.2 D1.2 D3.1 D6.1 D8.1 D9.1 D10.1 D11.1 D12.1 EPD_C1.1 EPD_C2.1 EPD_C5.1 EPD_C6.1 EPD_C7.1 EPD_C8.1 EPD_C9.1 EPD_C10.1 EPD_C11.1 EPD_C12.1 IC1.3 IC4.2 J1.17 J1.MP1 J1.MP2 J2.A1 J2.A12 J2.B1 J2.B12 J2.MP1 J2.MP2 J2.MP3 J2.MP4 J3.1 J4.G1 J4.G2 J4.G3 J4.G4 J4.P6 MCP73831.2 R1_PWRUSB.1 R2-USB1.1 R2-USB.2 R2.1 R2_BAT.1 R4.1 RESET_BUTTON.1 RESET_BUTTON.2 SENSOR2.1 SENSOR2.5 SENSOR2.7 SJ1.1 TP4.TP TP5.TP U1.4 U1.9 U2.1 U2.28 U2.29_1 U2.29_2 U2.29_3 U2.29_4 U2.29_5 U2.29_6 U2.29_7 U2.29_8 U2.29_9 U3.13 U4.1 U4.4 U4.6 U4.9
GPIO8 [normal nets]: R1.1 U2.10
I2C_PW [normal nets]: C1.1 C2.1 R1-PINH.2 R2-PINH.2 SENSOR2.2 SENSOR2.6 SENSOR2.8 U2.17
INT_RTC [normal nets]: R1_PINH1.1 TP15.TP U2.8 U3.3
IO/BOOT [normal nets]: BOOT_BUTTON.3 BOOT_BUTTON.4 C6.1 R_BOOT.1 U2.15
IO/CHANGE [normal nets]: C10.1 CHANGE_BUTTON.3 CHANGE_BUTTON.4 R_CHARGE.1 U2.23
MISO [normal nets]: D12.2 J4.P7 R8.1 TP6.TP U1.2 U2.27
MOSI [normal nets]: D11.2 J1.14 J4.P3 R7.1 TP7.TP U1.5 U2.7
N$1 [normal nets]: J2.A5 R2-USB1.2
N$2 [normal nets]: C4.1 D3.2 D4.1
N$3 [normal nets]: C1_BAT1.1 D2.1 IC4.1 IC4.3 Q1.2
N$5 [normal nets]: J2.B5 R2-USB.1
N$17 [normal nets]: Q2.1 R4.2
N$22 [normal nets]: CHG_LED.C R1_BAT.1
N$23 [normal nets]: MCP73831.1 R1_BAT.2
N$24 [normal nets]: MCP73831.5 R2_BAT.2
N$49 [normal nets]: EPD_C12.2 J1.24
N$50 [normal nets]: EPD_C11.2 J1.23
N$51 [normal nets]: EPD_C10.2 J1.22
N$53 [normal nets]: EPD_C8.2 J1.20
N$54 [normal nets]: EPD_C6.2 J1.18
N$55 [normal nets]: EPD_C7.2 J1.19
N$61 [normal nets]: R1-PINH.1 R2-PINH.1
N$64 [normal nets]: C_DELAY.1 IC1.5
N$65 [normal nets]: EPD_C1.2 J1.4
N$66 [normal nets]: EPD_C2.2 J1.5
N$75 [normal nets]: D7.1 R_CAPACITOR.1
PREVGH [normal nets]: D5.1 EPD_C9.2 J1.21
PREVGL [normal nets]: D4.2
RESE [normal nets]: J1.3 Q2.2 R2.2 R3.2
RESE' [normal nets]: R3.1 SJ1.2
RESET [normal nets]: C5.1 IC1.1 R_RESET.1 RESET_BUTTON.3 RESET_BUTTON.4 U2.3
RTC_RST [normal nets]: U2.16 U3.4
RX [normal nets]: TP2.TP U2.24
SCK [normal nets]: D10.2 J1.13 J4.P5 R6.1 TP8.TP U1.6 U2.6
SCL [normal nets]: J3.4 SENSOR2.4 U2.20 U3.16 U4.7
SDA [normal nets]: J3.3 SENSOR2.3 U2.19 U3.15 U4.8
SRC [normal nets]: C4.2 D5.2 L1.1 Q2.3
SS_SD [normal nets]: D8.2 J4.P2 R10.1 U2.4
TX [normal nets]: TP1.TP U2.25
USB_D+ [normal nets]: D1.1 U2.14
USB_D- [normal nets]: D1.3 U2.13
VBAT: C2_BAT.1 MCP73831.3 Q1.3 TP3.TP U4.2 U4.3
VBUS: C1_BAT.1 C4_USB.1 C5_USB.1 CHG_LED.A D1.5 D2.2 MCP73831.4 PFMF.050.1.2 Q1.1 R1_PWRUSB.2 TP14.TP
VRTC: C8.1 C10_SUPERCAP.1 R_CAPACITOR.2 U3.14
VUSB: J2.A4 J2.A9 J2.B4 J2.B9 PFMF.050.1.1

## Tracks (layer width: path | path; a pad name or v marks a point on that pad's centre or on a via)
3V3  (via drill 0.3)
  Top 0.127: C3.+ 129.54,33.21 131.44,35.12 133.6,35.12 C1_BAT2.1 133.67,35.18 134.27,35.78 | 134.27,35.78 134.3,35.81 134.3,36.89 133.79,37.4 128.33,37.4 127.44,36.51 125.92,36.51 IC4.5 v123.89,36.51 | v162.75,18.86 165.23,18.86 J3.2 | 134.27,35.78 v151.19,18.86 | Q3.3 67.31,26.8 67.34,26.83 | 67.34,26.83 72.96,32.45 72.96,32.96 72.99,32.99 | 72.99,32.99 73.66,33.66 R_CL1.2 73.66,36.13 86.27,48.74 | 72.99,32.99 72.33,33.66 71.12,33.66 R9.2 | R1_PINH1.2 92.71,62.04 89.98,64.77 D7.2 90.3,64.39 88.84,62.93 88.84,61.78 88.27,61.21 U3.2 88.27,60.2 84.96,56.9 84.96,50.04 86.27,48.74 | 86.27,48.74 87.44,47.56 88.65,47.56 88.84,47.75 88.84,48.83 92.27,52.26 92.27,52.51 R2-PINH1.2 92.27,52.2 92.65,51.82 v93.03,51.82 | IC1.2 48.26,100.33 49.21,101.28 49.21,104.14 v49.09,104.27 | v52.9,108.08 52.39,108.08 52.07,108.39 R_CHARGE.2 | v63.25,108.33 61.4,108.33 61.34,108.39 60.96,108.39 R_RESET.2 | 7.62,100.97 8.89,100.97 10.16,99.69 C9.1 10.16,99.63 10.41,99.38 v10.99,99.38 | v20.13,107.63 20.89,108.39 R_BOOT.2 | 7.62,100.97 6.92,100.27 6.92,91.63 5.71,90.42 4.83,90.42 J4.P4 | 7.62,100.97 R10.2 | TP16.TP 29.34,6.03 34.16,6.03 35.05,5.14 36.07,5.14 36.77,5.84 36.77,20.57 32.26,25.08 R7.2 32.19,25.15 30.86,25.15 29.34,26.67 29.08,26.67 R8.2 29.02,26.73 25.59,26.73 9.65,42.67 v9.65,43.43 8.76,44.32 8.76,44.58 U2.2 | R1.2 19.05,41.78 v18.8,42.04 | 31.66,50.45 32.38,51.18 32.38,52.01 31.69,52.7 U1.3 | 31.66,50.45 29.21,48.01 R5.2 29.21,46.35 v26.92,44.07 | R6.2 35.56,27.69 38.7,30.83 | 38.7,30.83 38.73,30.86 38.73,53.28 39.43,53.98 | 39.43,53.98 39.43,55.24 | 39.43,53.98 U1.7 | 31.66,50.45 30.67,51.44 30.67,55.63 31.05,56.01 38.67,56.01 39.43,55.24
  Top 0.127: 39.43,55.24 U1.8 | 38.7,30.83 42.67,26.86 67.31,26.86 67.34,26.83
  Bottom 0.127: v151.19,18.86 v162.75,18.86 | v123.89,36.51 108.33,36.51 v93.03,51.82 | v63.25,108.33 53.15,108.33 v52.9,108.08 v49.09,104.27 49.09,104.33 26.86,104.33 23.56,107.63 v20.13,107.63 19.24,107.63 v10.99,99.38 10.99,97.47 3.81,90.3 3.81,65.47 7.05,62.23 7.05,45.97 9.59,43.43 v9.65,43.43 15.43,43.43 16.83,42.04 v18.8,42.04 24.89,42.04 v26.92,44.07
32KHZ  (via drill 0.3)
  Top 0.15: v93.47,54.61 93.47,51.63 93.09,51.24 92.33,51.24 R2-PINH1.1 | v93.47,56.58 89.53,60.52 U3.1 | v87.88,66.23 86.55,66.23 85.6,65.28 38.04,65.28 17.65,44.9 17.65,44.64 U2.9
  Bottom 0.15: v93.47,54.61 v93.47,56.58 93.47,56.64 87.88,62.23 v87.88,66.23
DN
  Top 0.15: 163.51,53.91 163.77,53.66 164.27,53.66 J2.B7 | 163.51,53.91 163.51,54.36 163.77,54.61 164.27,54.61 J2.A7 | 163.51,53.91 157.99,53.91 155.38,51.31 155.38,49.53 155.89,49.02 156.15,49.02 D1.4
DP
  Top 0.15: 164.91,54.17 164.34,54.17 J2.A6 | 164.91,54.17 165.16,54.42 165.16,54.86 164.91,55.12 164.34,55.12 J2.B6 | D1.6 156.21,50.86 163.45,50.86 163.64,50.67 165.48,50.67 166.05,51.24 166.05,52.96 164.91,54.1 164.91,54.17
EPD_3V3  (via drill 0.3)
  Top 0.127: 80.64,31.75 80.64,32.64 L1.2 | 80.64,31.75 88.9,23.5 EPD_C5.2 88.9,20.95 v88.01,20.95 | 80.64,31.75 C7.1 | Q3.2 68.2,19.3 67.5,19.3 64.39,16.19 63.82,16.19 TP17.TP 64.45,16.19 64.45,14.35 67.31,11.49 71.69,11.49 71.82,11.62 71.82,11.68 72.07,11.94 72.45,11.94 72.58,11.81 78.11,11.81 80.83,14.54 80.83,14.86 J1.16 80.9,14.92 81.28,14.92 J1.15 81.28,14.99 81.28,15.24 82.36,16.32 v82.36,16.45
  Bottom 0.127: v88.01,20.95 83.5,16.45 v82.36,16.45
EPD_3V3_C  (via drill 0.3)
  Top 0.127: Q3.1 66.36,19.3 v64.9,19.3 57.53,19.3 44.32,6.1 TP13.TP | R_CL1.1 73.66,31.62 67.94,25.91 67.94,20.89 67.5,20.45 v64.9,20.45 | v20.19,59.75 20.19,62.04 U2.18
  Bottom 0.127: v64.9,19.3 v64.9,20.45 34.29,20.45 29.46,25.27 29.46,44.51 20.19,53.78 v20.19,59.75
EPD_BUSY  (via drill 0.3)
  Top 0.15: v84.33,17.91 84.33,14.92 J1.9 | TP9.TP v76.2,77.47 47.62,77.47 29.46,59.31 12.51,59.31 10.03,61.78 10.03,62.04 U2.26
  Bottom 0.15: v84.33,17.91 84.33,69.34 v76.2,77.47
EPD_CS  (via drill 0.3)
  Top 0.15: TP10.TP 58.99,6.29 63.31,10.6 79.06,10.6 82.8,14.35 82.8,14.86 J1.12 82.8,14.99 v82.8,17.65 | v72.2,32.32 71.12,32.32 R9.1 71.06,32.38 v52.96,32.38 | v74.8,31.3 75.63,30.48 D6.2 | v32.07,32.38 20.19,44.26 20.19,44.58 U2.11
  Bottom 0.15: v72.2,32.32 73.79,32.32 v74.8,31.3 74.8,31.24 82.8,23.24 v82.8,17.65 | v52.96,32.38 v32.07,32.38
EPD_DC  (via drill 0.3)
  Top 0.15: J1.11 83.31,14.86 83.31,14.41 79.18,10.29 64.71,10.29 59.24,4.83 23.56,4.83 13.84,14.54 TP11.TP 13.78,14.61 v12.57,15.81 | v12.57,40.39 12.57,44.58 U2.5
  Bottom 0.15: v12.57,15.81 v12.57,40.39
EPD_RST  (via drill 0.3)
  Top 0.15: v80.58,11.05 83.82,14.29 83.82,14.86 J1.10 | v75.31,11.05 55.82,11.05 TP12.TP | v18.22,63.18 17.14,63.18 16.38,62.42 16.38,62.1 U2.21
  Bottom 0.15: v75.31,11.05 v80.58,11.05 80.58,11.11 80.83,11.37 80.83,12.76 80.58,13.02 73.79,13.02 72.83,13.97 72.83,20 40.51,52.32 36.26,52.32 25.4,63.18 v18.22,63.18
FLASH_CS
  Top 0.15: U1.1 31.69,55.24 31.69,54.93 32.7,53.91 32.7,48.64 30.54,46.48 D9.2 30.48,46.35 29.21,45.09 R5.1 29.15,45.09 27.69,43.62 22.1,43.62 21.46,44.26 21.46,44.58 U2.12
GND  (via drill 0.3)
  Top 0.15: C5.2 67.31,108.39 66.61,108.39 65.79,107.57 RESET_BUTTON.2 65.66,107.57 RESET_BUTTON.1 62.17,107.5 62.17,107.25 61.47,106.55 52.96,106.55 52.83,106.68 52.77,106.68 | C_DELAY.2 52.07,105.98 52.77,106.68 | 52.77,106.68 52.77,107.57 52.64,107.7 50.93,107.7 50.8,107.57 CHANGE_BUTTON.2 50.74,107.57 v49.28,107.57 | BOOT_BUTTON.1 22.29,107.57 25.72,107.57 BOOT_BUTTON.2 25.78,107.57 26.61,108.39 27.05,108.39 C6.2 27.11,108.39 27.75,108.39 | 45.02,107.63 45.02,102.36 47.94,99.44 48.07,99.44 IC1.3 | 45.02,107.63 45.72,108.33 C10.2 45.72,108.39 46.35,108.39 47.24,107.5 CHANGE_BUTTON.1 47.31,107.57 v48.32,107.57 | 27.75,108.39 43.7,108.39 44.46,107.63 45.02,107.63 | D12.1 29.21,30.04 31.88,30.04 D11.1 | 33.34,31.5 35.56,31.5 D10.1 | 33.34,31.5 31.94,30.1 D11.1 | U1.4 31.62,51.44 31.62,51.75 30.99,52.39 30.99,55.56 31.11,55.69 33.21,55.69 U1.9 35.56,50.29 30.48,45.21 D9.1 | 33.34,31.5 33.34,42.16 30.54,44.96 D9.1 | U2.29_1 11.94,50.61 11.94,51.82 U2.29_2 11.94,51.88 11.94,52.96 U2.29_3 | U2.29_1 12,50.61 13.14,50.61 U2.29_4 13.21,50.61 14.35,50.61 U2.29_7 | v7.49,46.16 7.49,44.64 U2.1 | v11.24,49.91 11.87,50.55 U2.29_1 | U2.29_9 14.41,53.02 14.41,51.88 U2.29_8 14.35,51.88 13.21,51.88 U2.29_5 13.14,51.88 13.14,53.02 U2.29_6 13.08,53.02 11.94,53.02 U2.29_3 | U2.29_3 11.87,53.15 7.49,57.53 7.49,62.04 U2.28 7.49,62.1 7.49,77.41 15.37,85.28 J4.G1 15.43,85.34 15.43,86.36 16.26,87.19 16.26,90.17 15.43,91 J4.G2 15.37,91.06 14.54,91.89 14.54,99.25 | J4.G3 1.21,82.36 1.21,89.15 4.64,92.58 J4.P6 4.76,92.65 4.64,92.65 2.16,95.12 J4.G4 2.16,95.5 2.16,96.65 7.05,101.54 9.53,101.54 10.1,100.97 C9.2 10.16,100.84 11.94,99.06 D8.1 12.19,99.06 12.89,99.76 14.03,99.76 14.54,99.25
  Top 0.15: v29.02,44.32 29.59,44.32 30.23,44.96 30.42,44.96 D9.1 | 27.75,108.39 27.75,106.68 20.32,99.25 14.54,99.25 | C2.2 152.4,8.32 153.67,8.32 C1.2 153.67,9.02 155.07,10.41 155.07,10.48 | 155.07,10.48 154.56,10.99 154.56,11.24 SENSOR2.7 154.5,11.3 154.5,11.56 153.8,12.26 153.8,14.1 SENSOR2.1 | 155.07,10.48 155.64,10.48 156.15,10.99 156.15,11.24 SENSOR2.5 156.21,11.3 162.69,17.78 165.23,17.78 J3.1 165.29,17.84 165.61,17.84 166.5,18.73 166.5,49.28 | 166.5,49.28 168.78,49.28 J2.MP1 168.85,49.34 168.85,59.44 J2.MP2 168.78,59.5 164.97,59.5 J2.MP4 164.85,59.5 164.4,59.05 164.4,57.78 J2.A12 164.34,57.72 164.34,57.47 J2.B1 164.27,57.47 149.86,57.47 | 166.5,49.28 164.91,49.28 J2.MP3 | J2.A1 164.34,51.31 J2.B12 164.27,51.37 163.77,51.37 163.32,51.82 158.75,51.82 R2-USB1.1 158.69,51.82 158.5,51.82 v157.99,51.31 | C5_USB.2 155.57,46.16 155.57,47.37 C4_USB.2 155.57,47.43 v154.81,48.2 | 152.72,49.91 153.67,49.91 D1.2 | 152.72,49.91 152.59,49.91 151.96,49.28 151.96,49.02 151.64,48.7 150.62,48.7 150.43,48.9 150.43,49.72 151.13,50.42 R2-USB.2 151.13,50.67 149.86,51.94 149.86,57.47 | 152.72,49.91 v152.72,49.85 | 149.86,57.47 TP5.TP | C8.2 92.58,48.26 95.25,50.93 C10_SUPERCAP.2 95.31,50.99 96.2,51.88 96.2,52.51 | U3.13 85.72,51.88 89.22,55.37 94.74,55.37 96.2,53.91 96.2,52.51 | C2_BAT.2 129.79,48.07 129.79,48.45 131,49.66 131,49.85 MCP73831.2 131,49.97 131,50.16 131.57,50.74 135.45,50.74 | U4.9 138.68,53.72 137.99,53.02 137.67,53.02 U4.4 137.6,52.96 137.6,50.1 136.59,49.09 135.64,49.09 135.45,49.28 135.45,50.74 | U4.1 137.67,54.48 137.99,54.48 138.68,53.78 U4.9
  Top 0.15: U4.9 138.75,53.72 138.94,53.53 139.57,53.53 U4.6 139.64,53.47 139.95,53.47 v144.78,48.64 | 135.45,50.74 135.45,51.31 135.51,51.37 135.51,52.45 134.87,53.09 C1_BAT.2 134.81,53.15 134.56,53.4 123.83,53.4 122.94,52.51 122.75,52.51 R2_BAT.1 122.68,52.51 116.78,52.51 | 116.78,52.51 96.2,52.51 | 89.34,16 89.34,12.45 J1.MP1 | 92.46,19.11 89.34,16 | 92.46,19.11 92.46,21.27 83.28,30.45 | 83.28,30.45 81.98,31.75 C7.2 | 83.28,30.45 88.39,35.56 D3.1 | EPD_C10.1 80.01,19.68 81.28,19.68 EPD_C9.1 | EPD_C9.1 81.34,19.68 82.55,19.68 EPD_C8.1 82.61,19.68 83.82,19.68 EPD_C7.1 83.88,19.68 85.09,19.68 EPD_C6.1 | EPD_C1.1 91.44,19.68 90.23,19.68 EPD_C2.1 90.17,19.68 88.9,19.68 EPD_C5.1 88.84,19.68 87.12,19.68 85.79,18.35 82.87,18.35 82.45,17.94 | 82.45,17.94 80.33,15.81 80.33,14.99 J1.17 80.33,14.86 80.33,14.54 78.23,12.45 75.88,12.45 J1.MP2 75.88,12.51 75.88,14.61 72.2,18.29 72.2,18.35 | v81.53,18.92 81.53,19.62 EPD_C9.1 | 82.45,17.94 v82.36,18.03 | SJ1.1 67.88,12.76 67.88,15.24 R2.1 67.94,15.3 71.18,18.54 | 71.18,18.54 71.37,18.35 72.2,18.35 | 71.18,18.54 70.67,19.05 R4.1 70.42,19.05 69.47,20 39.75,20 31.94,27.81 31.94,29.97 D11.1 | 72.2,18.35 72.39,18.54 EPD_C11.1 72.33,20.95 71.12,20.95 EPD_C12.1 71.12,21.02 70.42,21.72 70.42,22.67 74.17,26.42 74.17,30.48 D6.1 | v87.5,16 89.34,16 | C1_BAT2.2 133.6,36.39 129.73,36.39 C3.- 129.48,36.2 126.62,36.2 125.54,35.12 123.95,35.12 123.83,34.99 123.76,34.99 | 123.76,34.99 123.76,34.23 122.62,33.08 122.62,31.75 C1_BAT1.2 122.56,31.69 121.92,31.05 120.84,31.05 | 123.76,34.99 123.19,35.56 IC4.2 | 120.84,31.05 118.3,33.59 118.11,33.59 R1_PWRUSB.1 118.05,33.66 116.78,34.92 116.78,52.51
  Top 0.15: 116.84,19.11 116.84,26.99 120.84,30.99 120.84,31.05 | 116.84,19.11 TP4.TP | 116.84,19.11 92.46,19.11
  Bottom 0.15: v48.32,107.57 v49.28,107.57 | v11.24,49.91 9.37,48.04 | 9.37,48.04 v7.49,46.16 | v29.02,44.32 27.3,44.32 24,47.62 9.78,47.62 9.37,48.04 | v152.72,49.85 153.26,49.31 | 153.26,49.31 154.37,48.2 v154.81,48.2 154.88,48.2 v157.99,51.31 | v81.53,18.92 82.36,18.1 v82.36,18.03 82.36,17.97 81.92,17.53 81.92,16.26 82.17,16 v87.5,16 | 153.26,49.31 152.59,48.64 v144.78,48.64
  pour Top: 0.1,43.7 0.1,0.1 73.5,0.1 73.5,10.1 91.9,10.1 91.9,0.1 170.1,0.1 170.1,67.1 92.1,67.1 92.1,111.1 68.68,111.1 68.68,109.77 19.86,109.77 19.86,111.1 0.1,111.1 0.1,62.7 6.4,62.7 6.4,43.7
  pour Bottom: 0.1,43.7 0.1,0.1 73.5,0.1 73.5,10.1 91.9,10.1 91.9,0.1 170.1,0.1 170.1,67.1 92.1,67.1 92.1,111.1 68.68,111.1 68.68,109.77 19.86,109.77 19.86,111.1 0.1,111.1 0.1,62.7 6.4,62.7 6.4,43.7
GPIO8
  Top 0.15: R1.1 19.05,40.2 18.35,40.89 18.35,44.07 18.86,44.58 U2.10
I2C_PW  (via drill 0.3)
  Top 0.15: SENSOR2.6 155.32,11.3 155.32,13.14 154.56,13.91 154.56,14.1 SENSOR2.2 154.56,14.22 154.56,14.35 153.99,14.92 153.48,14.92 153.23,14.67 153.23,11.81 153.73,11.3 SENSOR2.8 153.73,10.73 151.7,8.7 | R2-PINH.2 156.21,8.32 154.94,8.32 R1-PINH.2 154.88,8.26 153.67,7.05 C1.1 153.67,6.99 152.4,6.99 C2.1 152.4,7.05 151.7,7.75 151.7,8.7 | v23.5,59.75 21.46,61.78 21.46,62.04 U2.17 | v150.05,10.29 151.64,8.7 151.7,8.7
  Bottom 0.15: v23.5,59.75 26.23,59.75 71.31,14.67 71.31,14.41 75.44,10.29 v150.05,10.29
INT_RTC  (via drill 0.3)
  Top 0.15: R1_PINH1.1 92.71,60.52 93.41,61.21 93.41,62.48 90.42,65.47 87.38,65.47 87,65.09 U3.3 86.93,60.52 86.93,60.13 85.66,58.86 v33.72,58.86 | v16.38,41.85 16.38,44.58 U2.8 16.38,44.64 16.38,44.9 v30.35,58.86 | TP15.TP v16.38,25.53
  Bottom 0.15: v16.38,25.53 v16.38,41.85 | v30.35,58.86 v33.72,58.86
IO/BOOT  (via drill 0.3)
  Top 0.15: 23.94,106.81 21.34,106.81 21.02,107.12 R_BOOT.1 20.89,107.12 20,107.12 19.68,107.44 19.68,108.27 20.45,109.03 22.23,109.03 BOOT_BUTTON.4 22.29,109.09 25.72,109.09 BOOT_BUTTON.3 | 23.94,106.81 26.54,106.81 26.8,107.06 27.05,107.06 C6.1 | v23.94,66.93 23.94,62.1 U2.15 | 23.94,106.81 v23.94,106.62
  Bottom 0.15: v23.94,106.62 v23.94,66.93
IO/CHANGE
  Top 0.15: 48.77,107.38 48.2,106.81 46.48,106.81 46.23,107.06 45.72,107.06 C10.1 | 48.77,107.76 48.77,107.38 | 48.77,107.76 47.5,109.03 47.31,109.03 CHANGE_BUTTON.4 | 49.53,106.81 49.4,106.81 48.83,107.38 48.77,107.38 | 49.53,106.81 51.56,106.81 51.82,107.06 52.07,107.06 R_CHARGE.1 | CHANGE_BUTTON.3 50.74,109.03 50.1,109.03 48.83,107.76 48.77,107.76 | 49.53,106.81 49.53,99.69 13.84,64.01 13.84,62.1 U2.23
MISO  (via drill 0.3)
  Top 0.15: v29.91,25.46 29.08,25.46 R8.1 | v29.91,30.8 29.21,31.5 D12.2 | v31.62,53.34 31.62,53.98 U1.2 | v6.48,92.33 5.14,93.66 5.02,93.66 J4.P7 | v8.19,73.15 8.19,62.55 8.64,62.1 U2.27 8.76,62.04 8.76,61.78 13.53,57.02 v27.88,57.02 27.88,57.09 v37.47,66.67 | TP6.TP 140.27,63.5 137.1,66.67 v66.67,66.67
  Bottom 0.15: v29.91,25.46 v29.91,30.8 29.91,30.86 31.62,32.58 v31.62,53.34 31.56,53.34 v27.88,57.02 | v6.48,92.33 6.48,91.82 8.19,90.11 v8.19,73.15 | v37.47,66.67 v66.67,66.67
MOSI  (via drill 0.3)
  Top 0.15: v72.26,11.49 78.17,11.49 79.69,13.02 80.33,13.02 81.79,14.48 81.79,14.86 J1.14 | v47.18,11.49 32.26,26.42 R7.1 32.19,26.48 31.43,26.48 28.45,29.46 28.45,32.26 | v39.43,39.37 39.43,51.44 U1.5 v50.8,51.44 | v32.89,32.83 32.89,32.51 31.94,31.56 D11.2 31.88,31.56 31.18,32.26 28.45,32.26 | 28.45,32.26 25.34,32.26 15.11,42.48 15.11,44.58 U2.7 15.05,44.64 v15.05,54.61 | v4.25,88.58 4.95,89.28 J4.P3 | TP7.TP 86.36,87 v65.09,65.72
  Bottom 0.15: v47.18,11.49 v72.26,11.49 | v32.89,32.83 v39.43,39.37 | v4.25,88.58 4.25,65.41 v15.05,54.61 | v50.8,51.44 v65.09,65.72
N$1
  Top 0.15: R2-USB1.2 164.27,53.15 J2.A5 | R2-USB1.2
N$2
  Top 0.15: C4.1 93.98,34.92 92.58,34.92 91.95,35.56 D3.2 92.08,35.37 88.46,31.75 D4.1
N$3
  Top 0.15: 121.13,32.73 120.65,33.21 D2.1 | 121.13,32.73 121.22,32.64 121.22,31.75 C1_BAT1.1 | 121.13,32.73 123,34.61 IC4.3 122.94,34.61 122.36,35.18 122.36,35.94 122.87,36.45 123,36.45 IC4.1 123.13,36.51 123.64,37.02 125.67,37.02 136.27,47.62 137.03,47.62 Q1.2
N$5
  Top 0.15: R2-USB.1 151.13,49.47 152.84,51.18 152.84,51.31 157.67,56.13 164.27,56.13 J2.B5
N$17
  Top 0.15: R4.2 71.75,19.05 71.75,19.18 70.1,20.83 70.1,27.69 76.07,33.66 76.39,33.66 Q2.1
N$22
  Top 0.15: CHG_LED.C 126.49,52.45 126.49,49.97 R1_BAT.1
N$23
  Top 0.15: R1_BAT.2 127.89,49.91 130.05,49.91 MCP73831.1
N$24
  Top 0.15: R2_BAT.2 124.08,52.51 125.35,52.51 125.92,53.09 129.48,53.09 130.05,52.51 MCP73831.5
N$49
  Top 0.15: J1.24 76.83,17.59 72.77,21.65 71.69,21.65 71.12,22.23 EPD_C12.2
N$50
  Top 0.15: J1.23 77.28,14.92 77.28,17.59 72.64,22.23 72.39,22.23 EPD_C11.2
N$51
  Top 0.15: J1.22 77.85,19.05 79.76,20.95 80.01,20.95 EPD_C10.2
N$53
  Top 0.15: J1.20 78.87,14.92 78.87,19.62 79.63,20.38 81.98,20.38 82.55,20.95 EPD_C8.2
N$54
  Top 0.15: J1.18 79.88,14.92 79.88,16.19 82.49,18.8 85.79,18.8 86.11,19.11 86.11,20.19 85.34,20.95 85.09,20.95 EPD_C6.2
N$55
  Top 0.15: J1.19 79.38,14.92 79.38,16.13 82.36,19.11 85.66,19.11 85.79,19.24 85.79,20.07 85.47,20.38 84.39,20.38 83.82,20.95 EPD_C7.2
N$61
  Top 0.15: R1-PINH.1 154.94,6.99 156.21,6.99 R2-PINH.1
N$64
  Top 0.15: C_DELAY.1 52.07,99.89 50.99,100.97 50.99,101.22 IC1.5
N$65
  Top 0.15: J1.4 86.87,14.92 86.87,16 89.98,19.11 92.01,19.11 92.14,19.24 92.14,20.26 91.44,20.95 EPD_C1.2
N$66  (via drill 0.3)
  Top 0.15: v86.36,18.29 86.36,14.92 J1.5 | v88.08,20.13 88.27,20.13 88.52,20.38 89.6,20.38 90.17,20.95 EPD_C2.2
  Bottom 0.15: v86.36,18.29 86.36,18.41 v88.08,20.13
N$75
  Top 0.15: D7.1 87.88,64.77 87.88,62.87 88.2,62.55 R_CAPACITOR.1
PREVGH  (via drill 0.3)
  Top 0.15: v78.36,18.92 78.36,14.92 J1.21 | EPD_C9.2 81.28,21.02 v80.64,21.65 80.64,21.72 77.79,24.57 77.79,37.85 80.77,40.83 80.77,41.91 D5.1
  Bottom 0.15: v78.36,18.92 78.36,19.37 v80.64,21.65
RESE  (via drill 0.3)
  Top 0.15: v86.93,14.16 87.31,14.54 87.31,14.86 J1.3 | v73.28,14.16 71.88,14.16 71.12,13.4 | 71.12,13.4 69.28,15.24 R2.2 | 71.12,13.4 R3.2 | v76.45,19.05 76.45,32.32 Q2.2
  Bottom 0.15: v73.28,14.16 76.45,14.16 | 76.45,14.16 v86.93,14.16 | 76.45,14.16 v76.45,19.05
RESE'
  Top 0.15: SJ1.2 69.98,12.06 71.12,12.06 R3.1
RESET  (via drill 0.3)
  Top 0.15: C5.1 67.31,107.31 68.01,108.01 68.01,108.84 67.82,109.03 65.79,109.03 RESET_BUTTON.3 65.66,109.09 62.23,109.09 RESET_BUTTON.4 62.17,109.03 60.45,109.03 60.26,108.84 60.26,107.06 | v48.77,101.92 IC1.1 | 60.26,107.06 60.9,107.06 R_RESET.1 | 60.26,107.06 v53.91,107.06 | v10.03,48.07 10.03,44.64 U2.3 | v48.77,97.85 v15.49,64.58
  Bottom 0.15: v53.91,107.06 v48.77,101.92 v48.77,97.85 | v10.03,48.07 15.49,53.53 v15.49,64.58
RTC_RST  (via drill 0.3)
  Top 0.15: v28.89,61.09 23.43,61.09 22.73,61.78 22.73,62.04 U2.16 | v59.82,61.09 79.63,61.09 80.33,61.78 84.77,61.78 85.72,60.83 U3.4
  Bottom 0.15: v59.82,61.09 v28.89,61.09
RX
  Top 0.15: U2.24 12.51,62.1 12.51,65.98 12.19,66.29 TP2.TP
SCK  (via drill 0.3)
  Top 0.15: v80.39,12.57 82.3,14.48 82.3,14.86 J1.13 | v61.34,25.27 35.56,25.27 R6.1 35.5,25.34 34.86,25.97 34.86,27.37 35.56,28.07 D10.2 | v40.32,51.88 39.5,52.7 U1.6 | v13.84,49.85 13.84,44.64 U2.6 | v6.16,91.5 5.02,91.5 J4.P5 | TP8.TP 77.92,99.06 76.71,100.27 68.71,100.27 v28.19,59.75
  Bottom 0.15: v80.39,12.57 73.79,12.57 71.63,14.73 71.63,14.99 v61.34,25.27 61.34,25.34 40.32,46.35 v40.32,51.88 36.26,51.88 28.29,59.85 | v13.84,49.85 13.84,51.44 18.8,56.39 18.8,60.39 19.05,60.64 | 19.05,60.64 27.5,60.64 28.29,59.85 | v6.16,91.5 6.16,74.55 19.05,61.66 19.05,60.64 | 28.29,59.85 v28.19,59.75
SCL  (via drill 0.3)
  Top 0.15: v146.18,47.88 145.45,48.61 | 145.45,48.61 140.08,53.98 139.64,53.98 U4.7 | J3.4 165.23,20.83 165.16,20.89 v164.21,20.89 164.15,20.89 157.42,14.16 SENSOR2.4 | v19.24,60.2 17.65,61.78 17.65,62.04 U2.20 | v39.88,50.8 79.5,50.8 80.71,49.59 v84.77,49.59 | v88.9,50.04 88.9,50.55 89.53,51.18 U3.16 | 145.45,48.61 145.03,48.2 v138.3,48.2
  Bottom 0.15: v146.18,47.88 146.18,38.92 v164.21,20.89 | v19.24,60.2 27.11,60.2 36.51,50.8 v39.88,50.8 | v84.77,49.59 88.46,49.59 v88.9,50.04 88.96,50.04 91.19,52.26 93.22,52.26 97.28,48.2 v138.3,48.2
SDA  (via drill 0.3)
  Top 0.15: v144.34,50.35 140.21,54.48 139.64,54.48 U4.8 | v164.21,20.26 164.78,20.26 165.23,19.81 J3.3 165.29,19.81 165.54,19.81 166.18,20.45 166.18,21.14 165.99,21.34 162.31,21.34 155.38,14.41 155.38,14.16 SENSOR2.3 | v45.72,77.92 34.29,77.92 18.92,62.55 18.92,62.1 U2.19 | v87.44,52.58 87.44,52.39 88.27,51.56 U3.15
  Bottom 0.15: v164.21,20.26 144.34,40.13 v144.34,50.35 137.03,50.35 134.81,52.58 v87.44,52.58 87.44,66.86 76.39,77.92 v45.72,77.92
SRC
  Top 0.15: Q2.3 78.55,33.02 78.55,35.12 L1.1 82.61,39.12 84.87,41.37 | 84.87,41.37 84.33,41.91 D5.2 | 84.87,41.37 89.98,36.26 93.98,36.26 C4.2
SS_SD
  Top 0.15: D8.2 13.4,99.06 12.7,98.36 10.35,98.36 9.08,99.63 7.62,99.63 R10.1 7.62,90.49 5.46,88.33 5.46,88.2 J4.P2 5.46,88.14 6.6,87 6.6,53.91 11.24,49.28 11.24,44.64 U2.4
TX
  Top 0.15: U2.25 11.24,62.1 11.24,64.45 9.46,66.23 TP1.TP
USB_D+
  Top 0.15: D1.1 153.73,50.86 153.99,50.86 154.5,50.35 154.5,48.58 154.31,48.39 150.5,48.39 138.94,59.94 138.94,64.39 137.54,65.79 86.55,65.79 82.87,62.1 36.32,62.1 24,49.78 24,44.64 U2.14
USB_D-  (via drill 0.3)
  Top 0.15: v152.4,49.09 152.46,49.02 153.67,49.02 D1.3 | v36.32,62.55 22.73,48.96 22.73,44.64 U2.13
  Bottom 0.15: v152.4,49.09 146.24,49.09 128.46,66.86 87.88,66.86 76.39,78.36 45.53,78.36 36.32,69.15 v36.32,62.55
VBAT  (via drill 0.3)
  Top 0.127: C2_BAT.1 129.79,46.8 129.79,46.99 131.95,49.15 131.95,49.85 MCP73831.3 132.02,49.91 v135,49.91 | Q1.3 136.14,49.78 v136.14,50.61 136.14,52.32 137.29,53.47 137.6,53.47 U4.3 137.67,53.53 137.67,53.98 U4.2 137.6,54.04 137.29,54.04 137.03,54.29 137.03,54.67 137.67,55.31 137.67,63.82 TP3.TP
  Bottom 0.127: v135,49.91 135.45,49.91 v136.14,50.61
VBUS
  Top 0.127: D1.5 156.21,49.91 156.46,49.91 157.04,49.34 157.04,44.7 155.96,43.62 PFMF.050.1.2 156.34,44.07 154.31,46.1 C5_USB.1 154.31,46.16 154.31,47.37 C4_USB.1 154.24,47.43 138.43,47.43 137.54,48.32 135.83,48.32 135.19,47.69 Q1.1 135.13,47.62 131.7,47.62 130.24,46.16 129.22,46.16 127.73,47.66 | 118.11,34.99 120.33,34.99 120.65,35.31 D2.2 | 118.11,34.99 118.11,37.85 118.05,37.91 TP14.TP 118.05,37.97 127.73,47.66 | 118.11,34.99 R1_PWRUSB.2 | 127.73,47.66 127.25,48.13 127.25,51.69 127.95,52.39 CHG_LED.A 127.95,52.45 128.97,52.45 129.73,51.69 131.19,51.69 131.95,52.45 MCP73831.4 132.02,52.45 132.59,51.88 134.81,51.88 C1_BAT.1
VRTC
  Top 0.127: U3.14 87,50.93 88.2,49.72 88.2,48.26 C8.1 | R_CAPACITOR.2 89.53,62.48 89.53,62.1 88.77,61.34 88.77,55.88 85.22,52.32 85.22,50.16 85.41,49.97 86.11,49.97 87,50.86 U3.14 | C10_SUPERCAP.1 95.25,53.47 93.66,55.05 89.28,55.05 87,52.77 U3.14
VUSB  (via drill 0.3)
  Top 0.127: J2.A4 164.34,51.88 164.34,52.13 J2.B9 164.4,52.13 164.85,52.13 v165.29,52.58 | J2.A9 164.34,56.9 164.34,56.71 J2.B4 164.4,56.71 164.78,56.71 v165.29,56.2 | v152.53,44.7 151.45,43.62 PFMF.050.1.1
  Bottom 0.127: v165.29,56.2 v165.29,52.58 160.4,52.58 v152.53,44.7